# Altium PCB PCB.PcbDoc
Units mm, origin at the board's own origin, x right, y up, seen from the top; angles counter-clockwise.
Board outline 54 x 30 mm, 2 copper layers (Top Layer, Bottom Layer); 9 components, 7 nets, 32 pads, 0 vias.
Unrouted connection lines stored in the file: 1.
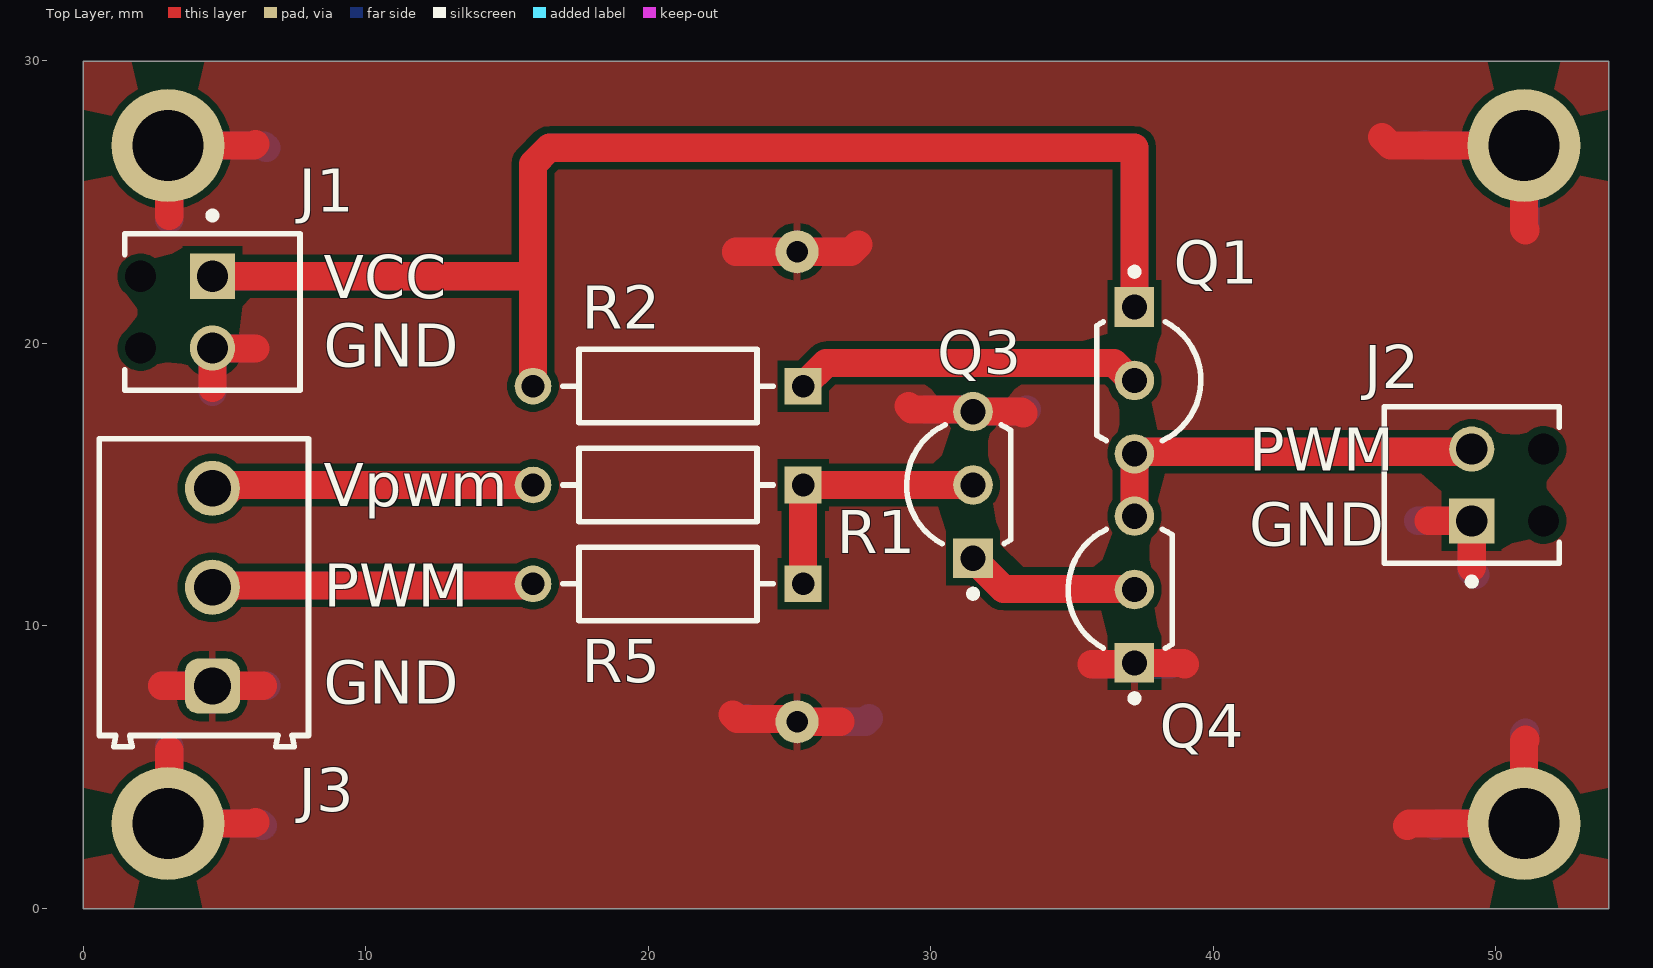
[diagram p0: Top Layer view]
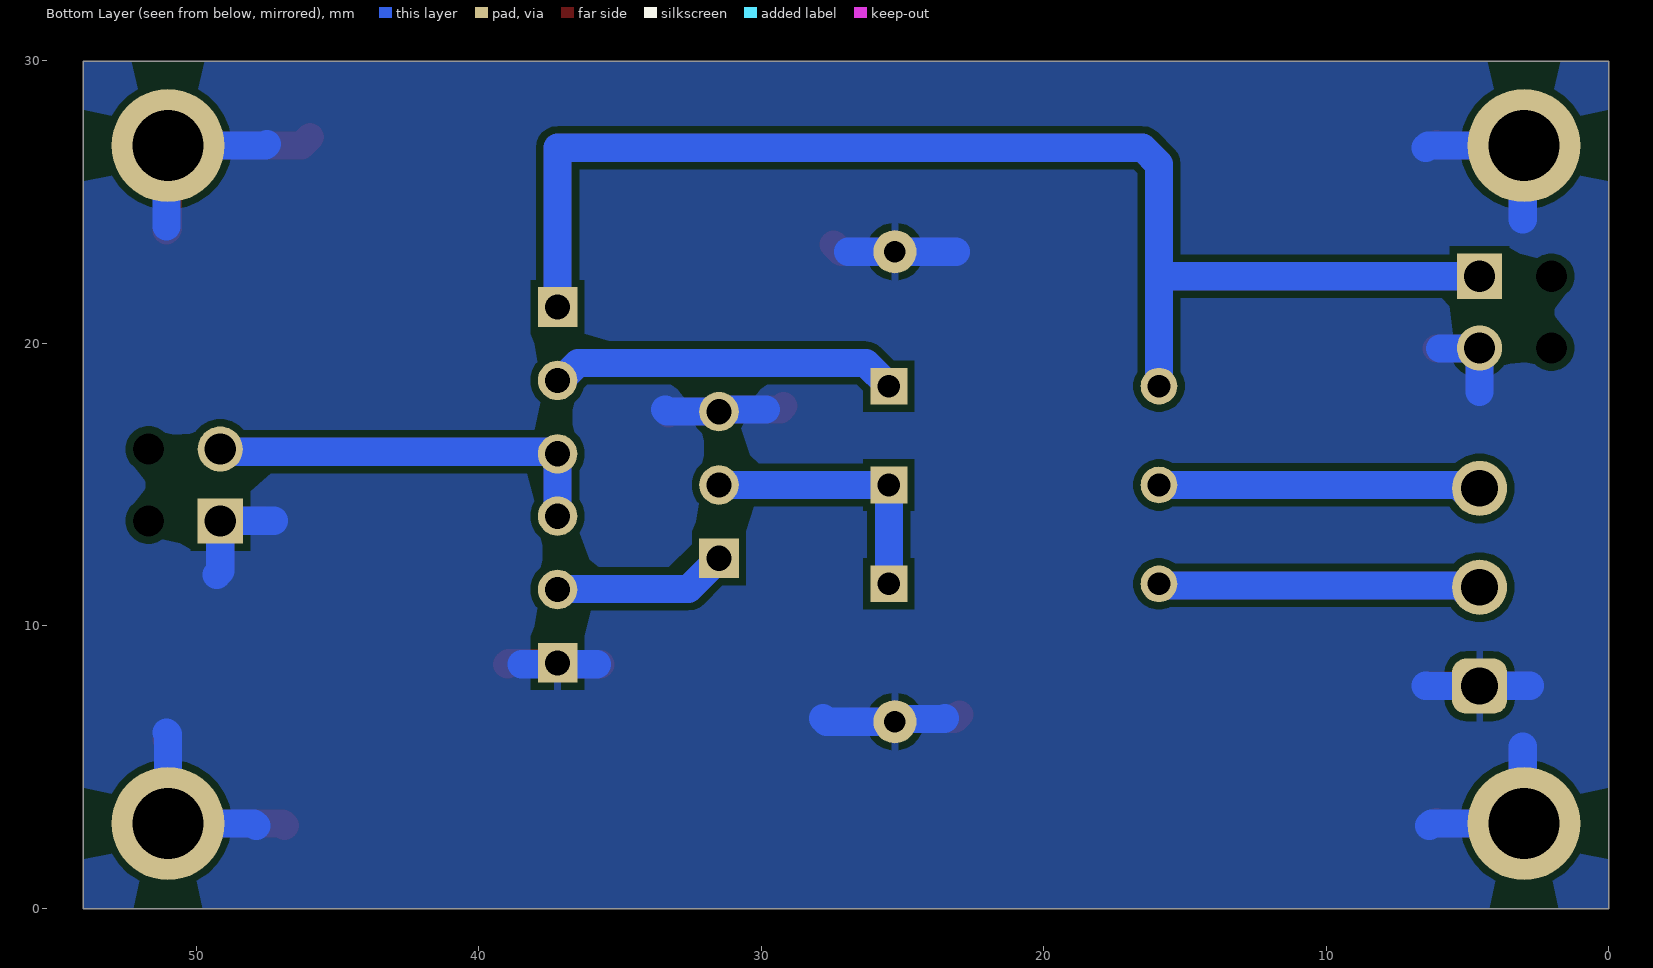
[diagram p1: Bottom Layer view, seen from below]
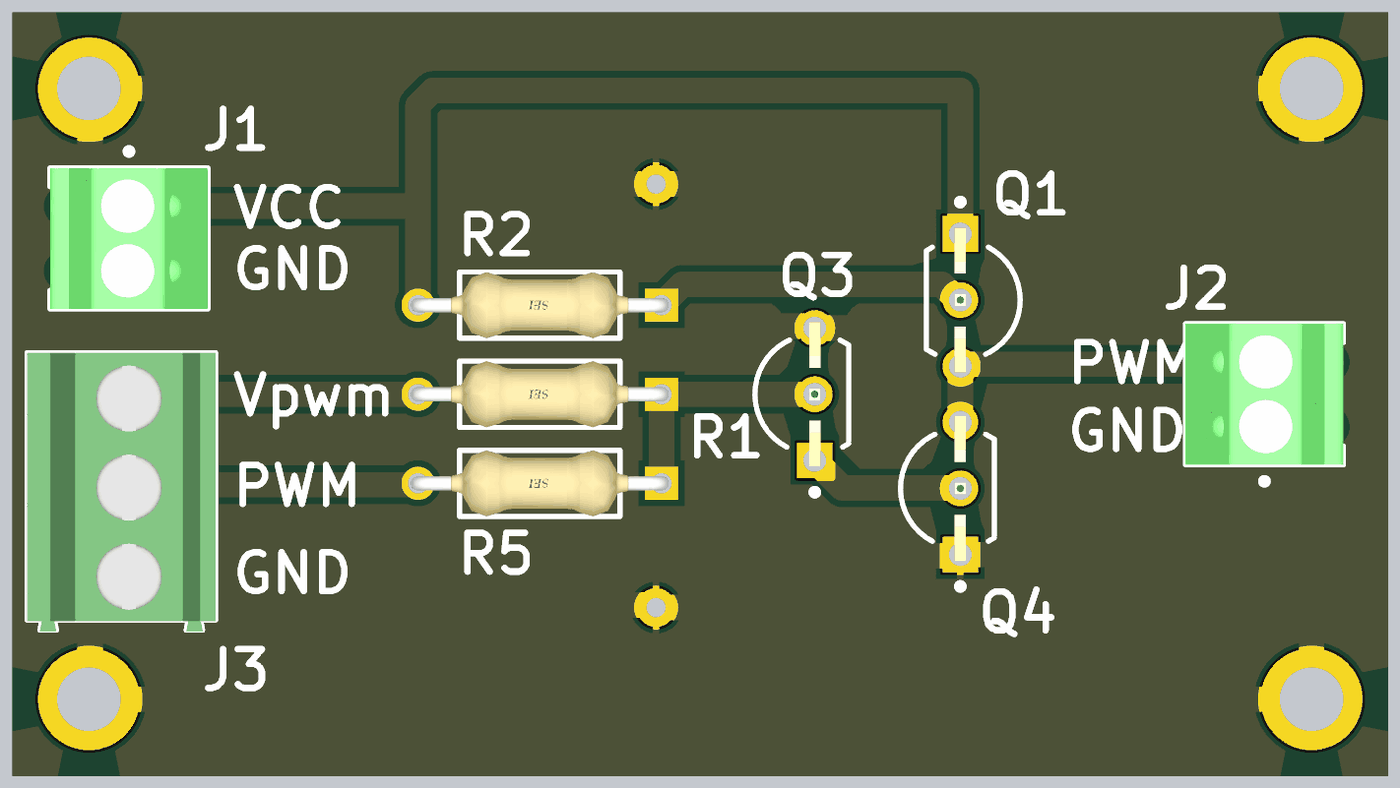
[diagram p2: 3D render of the assembled board from above, using the file's embedded part models]

## Layer stack, top to bottom
Top Solder: solder mask 0.0102, Solder Resist, Dk 3.5
Top Layer: signal copper 0.0356
Dielectric 1: dielectric 0.32, FR-4, Dk 4.8
Bottom Layer: signal copper 0.0356
Bottom Solder: solder mask 0.0102, Solder Resist, Dk 3.5

## Board outline
0,-0.016 0,29.984 54,29.984 54,-0.016

## Design rules (kind name [scope] priority, off if disabled: settings)
Clearance [All] p1: gap=0.254 ignorepadtopadclearanceinfootprint=FALSE except(0: Arc-Hole Track-Hole SMDPad-Hole THPad-Hole Via-Hole Fill-Hole Poly-Hole Region-Hole Text-Hole)
DiffPairsRouting [All] p1: maxlimit=2 minlimit=0.254 mostfreqgap=1 toplayer_minwidth=0.381 toplayer_maxwidth=0.381 toplayer_prefwidth=0.381 bottomlayer_minwidth=0.381 bottomlayer_maxwidth=0.381 bottomlayer_prefwidth=0.381 maxuncoupledlength=12.7
PolygonConnect [All] p1: connectstyle=Relief reliefconductorwidth=0.254 reliefentries=4 polygonreliefangle="90 Angle" airgapwidth=0.254
RoutingVias [All] p1: holewidth=0.711 width=1.27 viastyle="Through Hole" minholewidth=0.711 minwidth=1.27 maxholewidth=0.711 maxwidth=1.27
SolderMaskExpansion [All] p1: expansion=0.102 istentingtop=FALSE
UnRoutedNet [All] p1: checkbadconnections=TRUE
Width [All] p1: maxlimit=3 minlimit=0.254 preferedwidth=1 minimp=50.000000 maximp=50.000000 favimp=50.000000
28 further rules are at their usual default settings.

## Components (designator, comment, footprint, x,y, rotation, side; value= is the part's Value field where it differs from the comment)
J1 "1725656" PHOE-1725656-2 4.572,21.103 r270 top
J2 "1725656" PHOE-1725656-2 49.149,14.984 r90 top
J3 "691214110003" 691214110003 4.272,11.365 r90 top
Q1 "BC548" ONSC-TO-92-3-29-11_AM_BL 37.211,18.684 r270 top
Q3 "BC548" ONSC-TO-92-3-29-11_AM_BL 31.496,14.984 r90 top
Q4 "BC558" ONSC-TO-92-3-29-11_AM_BL 37.211,11.284 r90 top
R1 "1kΩ" FP-CF14-MFG 20.701,14.984 r180 top
R2 "220Ω" FP-CF14-MFG 20.701,18.484 r180 top
R5 "5.6Ω" FP-CF14-MFG 20.701,11.484 r180 top

## Footprints (in the part's own frame and the unit in brackets; to place one, negate y for a bottom-side part, rotate by r counter-clockwise, add the part's x,y. Pads: shape width x height; smd on the part's side, far side on the other; paste and mask are expansions set on the pad)
691214110003 [mm] "3.50 mm Horizontal Entry Modular, 3p"
  rrect50% 1.95x1.95 hole 1.3: 1(-3.5,-0.3)
  round 1.95 hole 1.3: 2(0,-0.3) 3(3.5,-0.3)
  silkscreen extent -5.65,-3.7 5.25,3.7, body extent -5.7,-3.7 5.25,3.7, height 8.55
FP-CF14-MFG [mm]
  rect 1.3x1.3 hole 0.8 paste-2539.97 mask+0: 1(-4.78,0)
  round 1.3 hole 0.8 paste-2539.97 mask+0: 2(4.78,0)
  silkscreen extent -3.73,-1.3 3.73,1.3, body extent -5.53,-1.4 5.53,1.4, height 0.25
ONSC-TO-92-3-29-11_AM_BL [mm] "TO, 3-Leads, Body Dia 4.7mm, Pitch 2.6mm"
  rect 1.4x1.4 hole 0.9: 1(-2.6,0)
  round 1.4 hole 0.9: 2(0,0) 3(2.6,0)
  silkscreen extent -3.97,-1.34 2.13,2.35, body extent -2.84,-1.34 2.84,2.35, height 5.33
PHOE-1725656-2 [mm] "Connector, 2-Leads, Body 6.2x5.4mm, Pitch 2.54mm"
  rect 1.6x1.6 hole 1.1: 1(-1.27,0)
  round 1.6 hole 1.1: 2(1.27,0)
  round 0 hole 1.1 unplated: MH1(-1.27,-2.54) MH2(1.27,-2.54)
  silkscreen extent -3.54,-3.1 2.77,3.1, body extent -2.77,-3.1 2.77,3.1, height 9

## Part data
J1 J2: library part CMP-2000-05299-1, "Male Header, Pitch 2.54 mm, 1 x 2 Position, Height 9 mm, Tail Length 3.5 mm", Colour=Green, Manufacturer="Phoenix Contact", Content=250pc(s), Datasheet URL=http://datasheet.octopart.com/1725656-Phoenix-Contact-datasheet-5302866.pdf, Datasheet Version=Apr-08, Industrial packaging=Yes, Manufacturer part No.=1725656, Manufacturer URL=http://www.phoenixcontact.com/, Number of contacts=2, Pitch=2.54mm, Type=MPT0,5/2-2,54
J3: library part CMP-1502-02466-2, Color="Blue, Green", Current=10A, Max Operating Temperature=105°C, Min Operating Temperature=-40°C, Voltage=300V, Contact Material=Brass, Contact Plating="Brass, Tin", Current Rating=10A, Height=12.2mm, Housing Material=Nylon, Lead Pitch=3.5mm, Length=7.4mm, Mount="Through Hole", NexarPartId=18818289, Number of contacts=3, Number of Levels=1, Number of Pins=3, Number of Positions Per Level=3, Packaging=Box, Pitch=3.5052mm, Plating="Brass, Steel", REACH SVHC=Unknown, RoHS=Compliant, Stripping Length=-6mm, Termination=Screw, Voltage Rating=300V, Width=10.9mm, Wire Gauge (Max)=24AWG, Wire Gauge (Min)=16AWG, Wire/Cable Gauge=24AWG
Q1 Q3: library part CMP-1048-01603-1, "Amplifier Transistor, NPN Silicon, 3-Pin TO-92, Pb-Free, Tape and Reel", Manufacturer="On Semiconductor", PartNumber=BC548BRL1G, ComponentLink1Description="Manufacturer URL", ComponentLink1URL=http://www.onsemi.com/, ComponentLink2Description=Datasheet, ComponentLink2URL=http://www.onsemi.com/pub_link/Collateral/BC546-D.PDF, ComponentLink3Description="Package Specification", ComponentLink3URL=http://www.onsemi.com/pub_link/Collateral/MAC97-D.PDF, DatasheetVersion="Rev. 7", fT Min (MHz)=150, IC Continuous (A)=0.1, Mounting Technology="Through Hole", PackageDescription="3-Pin Transistor Outline, Body 4.825 x 3.685 mm, Pitch 1.27 mm", PackageReference=TO-92-3-29-11_AM_BL, PackageVersion="Rev. AM", Packing="Tape and Reel", Polarity=NPN, RoHS=TRUE
Q4: library part CMP-1048-01513-1, "Amplifier Transistor, PNP Silicon, 3-Pin TO-92, Pb-Free, Tape and Reel", Manufacturer="On Semiconductor", PartNumber=BC558BRL1G, ComponentLink1Description="Manufacturer URL", ComponentLink1URL=http://www.onsemi.com/, ComponentLink2Description=Datasheet, ComponentLink2URL=http://www.onsemi.com/pub_link/Collateral/BC556B-D.PDF, ComponentLink3Description="Package Specification", ComponentLink3URL=http://www.onsemi.com/pub_link/Collateral/MAC97-D.PDF, DatasheetVersion="Rev. 3", IC Continuous (A)=-0.1, Mounting Technology="Through Hole", PackageDescription="3-Pin Transistor Outline, Body 4.825 x 3.685 mm, Pitch 1.27 mm", PackageReference=TO-92-3-29-11_AM_BL, PackageVersion="Rev. AM", Packing="Tape and Reel", Polarity=PNP, RoHS=TRUE
R1 R2 R5: library part CMP-26528-000003-1, "RES 7.5K OHM 1/4W 5% AXIAL", Case/Package=Axial, Max Operating Temperature=155°C, Max Power Dissipation=250mW, Min Operating Temperature=-55°C, Resistance=7.5kR, Resistor Type="Carbon Film", Temperature Coefficient=-400ppm/°C, Tolerance=5%, Contact Plating=Tin, Diameter=2.3mm, Features="Flame Retardant Coating", Lead Free="Lead Free", Length=0.256inch, Mount="Through Hole", Number of Terminations=2, Packaging="Tape and Reel", Power Rating=250mW, Radiation Hardening=No, RoHS Compliant=Yes, Series=CF

## Free pads (board coordinates)
  round 4 hole 2.5: 3(3,27) 4(3,3) 5(51,3) 6(51,27)
  round 1.524 hole 0.762: 7(25.267,6.604) 8(25.267,23.241)

## Nets (pads, with @x,y where several pads share a name; then routed paths per layer and width w, separated by ;. In a path a pad name is that pad's centre, name@x,y a point inside that pad or via, vN(x,y) a via of type N, cw(c..) or ccw(c..) an arc to the next point about the centre after c; other vN are vias at no path point)
GND: J1.2 J2.1 J3.1 pad.3 pad.4 pad.5 pad.6 pad.7 pad.8 Q3.3 Q4.1 | length 102.4
  Top Layer w1: 2.794,7.874 4.563,7.874 J3.1 4.581,7.874 6.35,7.874 ; 3.048,5.588 3.048,3.048 pad.4 6.048,3 6.096,3.048 ; 3.048,24.511 3.048,26.952 pad.3 6.045,27 6.096,27.051 ; 4.572,18.415 J1.2 4.593,19.812 6.096,19.812 ; 22.987,6.858 23.141,6.704 25.167,6.704 pad.7 26.797,6.604 ; 23.114,23.241 pad.8 27.178,23.241 27.432,23.495 ; 29.21,17.78 29.329,17.661 31.419,17.661 Q3.3 33.216,17.584 33.274,17.526 ; 35.687,8.636 37.163,8.636 Q4.1 38.941,8.684 38.989,8.636 ; 45.974,27.305 46.279,27 pad.6 51,24.057 51.054,24.003 ; 46.863,2.921 46.942,3 pad.5 51,5.915 51.054,5.969 ; 47.625,13.716 49.147,13.716 J2.1 49.149,12.065
  Bottom Layer w1: 2.794,7.874 4.563,7.874 J3.1 6.468,7.865 6.477,7.874 ; 3.048,5.715 3.048,3.048 pad.4 6.271,3 6.35,2.921 ; 3.048,24.384 3.048,26.952 pad.3 6.401,27 6.477,26.924 ; 4.572,18.288 J1.2 4.593,19.812 5.969,19.812 ; 23.114,23.241 pad.8 26.924,23.241 ; 23.495,6.731 23.522,6.704 25.167,6.704 pad.7 27.686,6.604 27.813,6.731 ; 29.845,17.653 31.427,17.653 Q3.3 33.332,17.584 33.401,17.653 ; 35.814,8.636 37.163,8.636 Q4.1 37.259,8.636 38.481,8.636 ; 47.244,13.716 47.246,13.714 J2.1 49.149,11.938 49.276,11.811 ; 47.498,27.051 47.549,27 pad.6 51.054,26.946 51.054,24.13 ; 47.879,2.921 47.958,3 pad.5 51,6.169 51.054,6.223
NetJ2_2: J2.2 Q1.3 Q4.3 | length 28.4
  Top Layer w1: Q4.3 Q1.3 37.288,16.161 49.056,16.161 J2.2
  Bottom Layer w1: Q4.3 Q1.3 37.288,16.161 49.056,16.161 J2.2
NetJ3_2: J3.2 R5.2 | length 23.1
  Top Layer w1: J3.2@4.572,10.984 4.829,10.984 5.275,11.43 15.867,11.43 R5.2
  Bottom Layer w1: J3.2@4.572,10.984 4.829,10.984 5.275,11.43 15.867,11.43 R5.2
NetJ3_3: J3.3 R1.2 | length 23.1
  Top Layer w1: J3.3@4.572,14.484 4.829,14.484 5.329,14.984 R1.2
  Bottom Layer w1: J3.3@4.572,14.484 4.829,14.484 5.331,14.986 15.919,14.986 R1.2
NetQ1_2: Q1.2 Q3.1 Q4.2 R2.1 | length 37
  Top Layer w1: R2.1 26.301,19.304 36.483,19.304 37.103,18.684 Q1.2 ; Q3.1 32.577,11.303 37.192,11.303 Q4.2
  Bottom Layer w1: R2.1 26.301,19.304 36.483,19.304 37.103,18.684 Q1.2 ; Q3.1 32.577,11.303 37.192,11.303 Q4.2
NetQ3_2: Q3.2 R1.1 R5.1 | length 19
  Top Layer w1: R5.1 R1.1 Q3.2
  Bottom Layer w1: R5.1 R1.1 Q3.2
VCC: J1.1 Q1.1 R2.2 | length 92.9
  Top Layer w1: J1.1 15.773,22.373 15.921,22.225 ; 15.9,22.754 15.921,22.733 ; R2.2 15.921,22.225 ; Q1.1 37.211,26.924 16.507,26.924 15.921,26.338 15.921,22.733 ; 15.921,22.225 15.921,22.733
  Bottom Layer w1: J1.1 15.773,22.373 15.921,22.225 ; 15.9,22.754 15.921,22.733 ; R2.2 15.921,22.225 ; Q1.1 37.211,26.924 16.507,26.924 15.921,26.338 15.921,22.733 ; 15.921,22.225 15.921,22.733
pads on no net: J1.MH1 J1.MH2 J2.MH1 J2.MH2

## Polygon pours and split planes (outlines as drawn)
GND on Top Layer "GND_L01_P000" (solid, pour order 0): 0,-0.016 0,29.984 54,29.984 54,-0.016
GND on Bottom Layer "GND_L02_P001" (solid, pour order 1): 0,-0.016 0,29.984 54,29.984 54,-0.016

## Silkscreen, mask and mechanical layers (free items; w line width, h text height)
Top Overlay:
  text "VCC" at 8.509,21.59 h1.52
  text "GND" at 8.509,19.177 h1.52
  text "PWM" at 41.275,15.494 h1.52
  text "Vpwm" at 8.509,14.224 h1.52
  text "GND" at 41.275,12.827 h1.52
  text "PWM" at 8.509,10.668 h1.52
  text "GND" at 8.509,7.239 h1.52
Mechanical 1:
  the board outline again, w0.254